# Altium PCB plp-cd_2c.PcbDoc
Units mm, origin at the board's own origin, x right, y up, seen from the top; angles counter-clockwise.
Board outline 34 x 22 mm, 4 copper layers (Top Layer, Signal Layer 1, Signal Layer 2, Bottom Layer), stack 1.026 mm thick; 45 components, 41 nets, 181 pads, 49 vias.
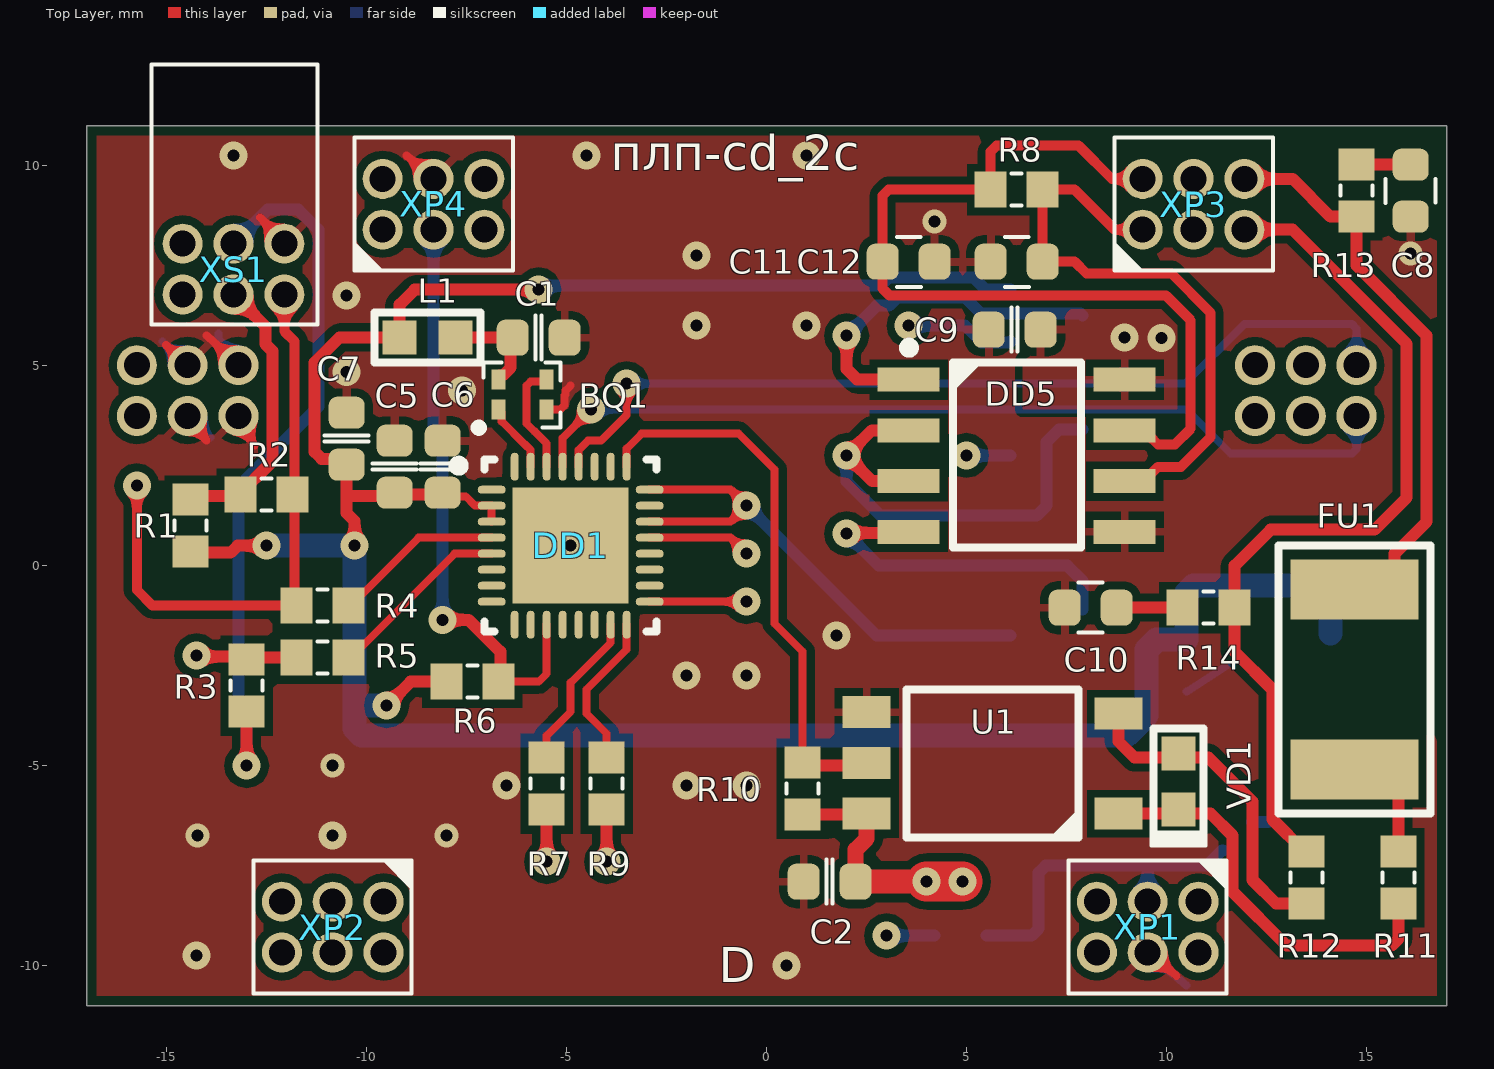
[diagram p0: Top Layer view]
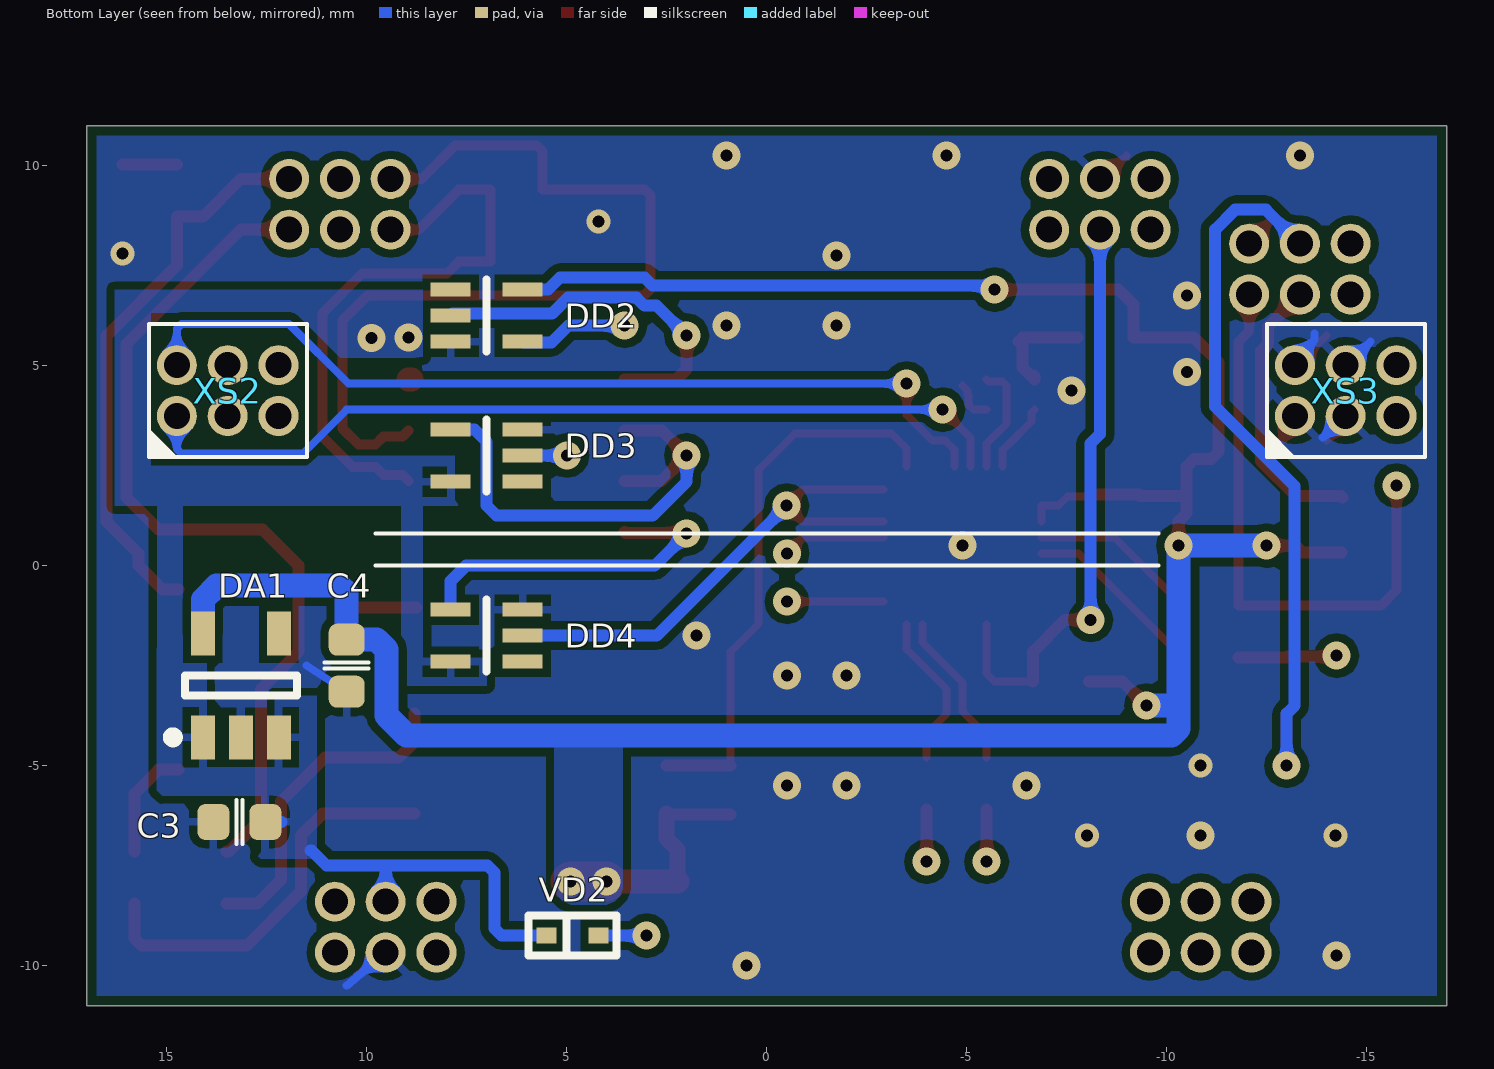
[diagram p1: Bottom Layer view, seen from below]
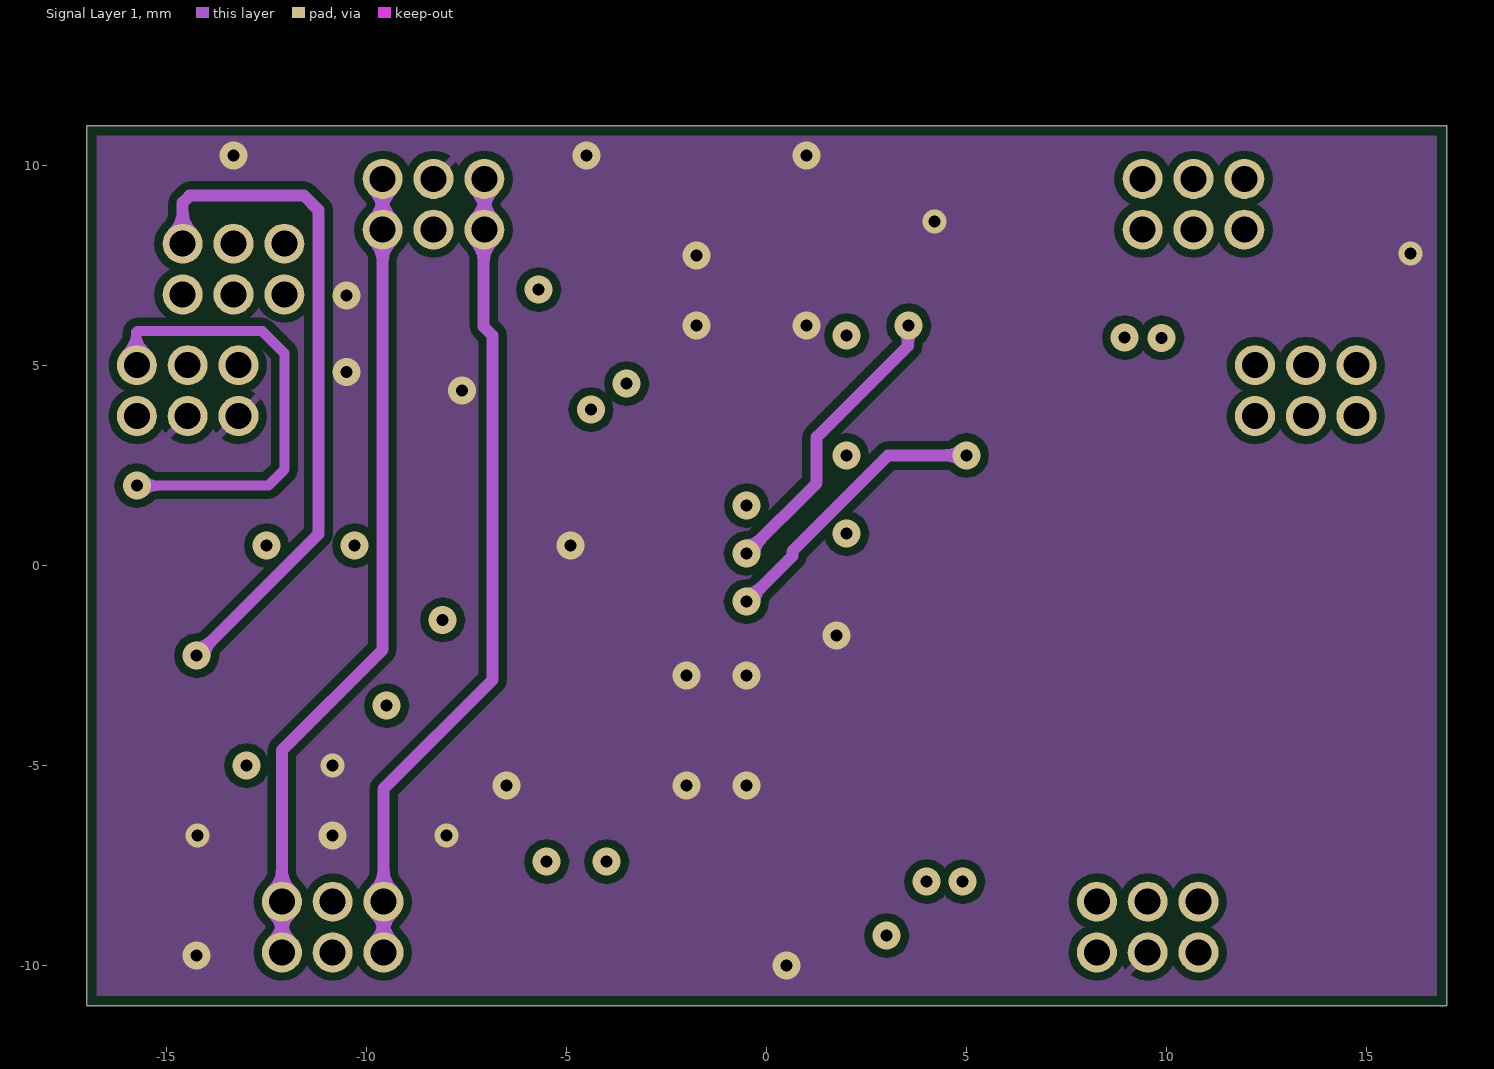
[diagram p2: Signal Layer 1]
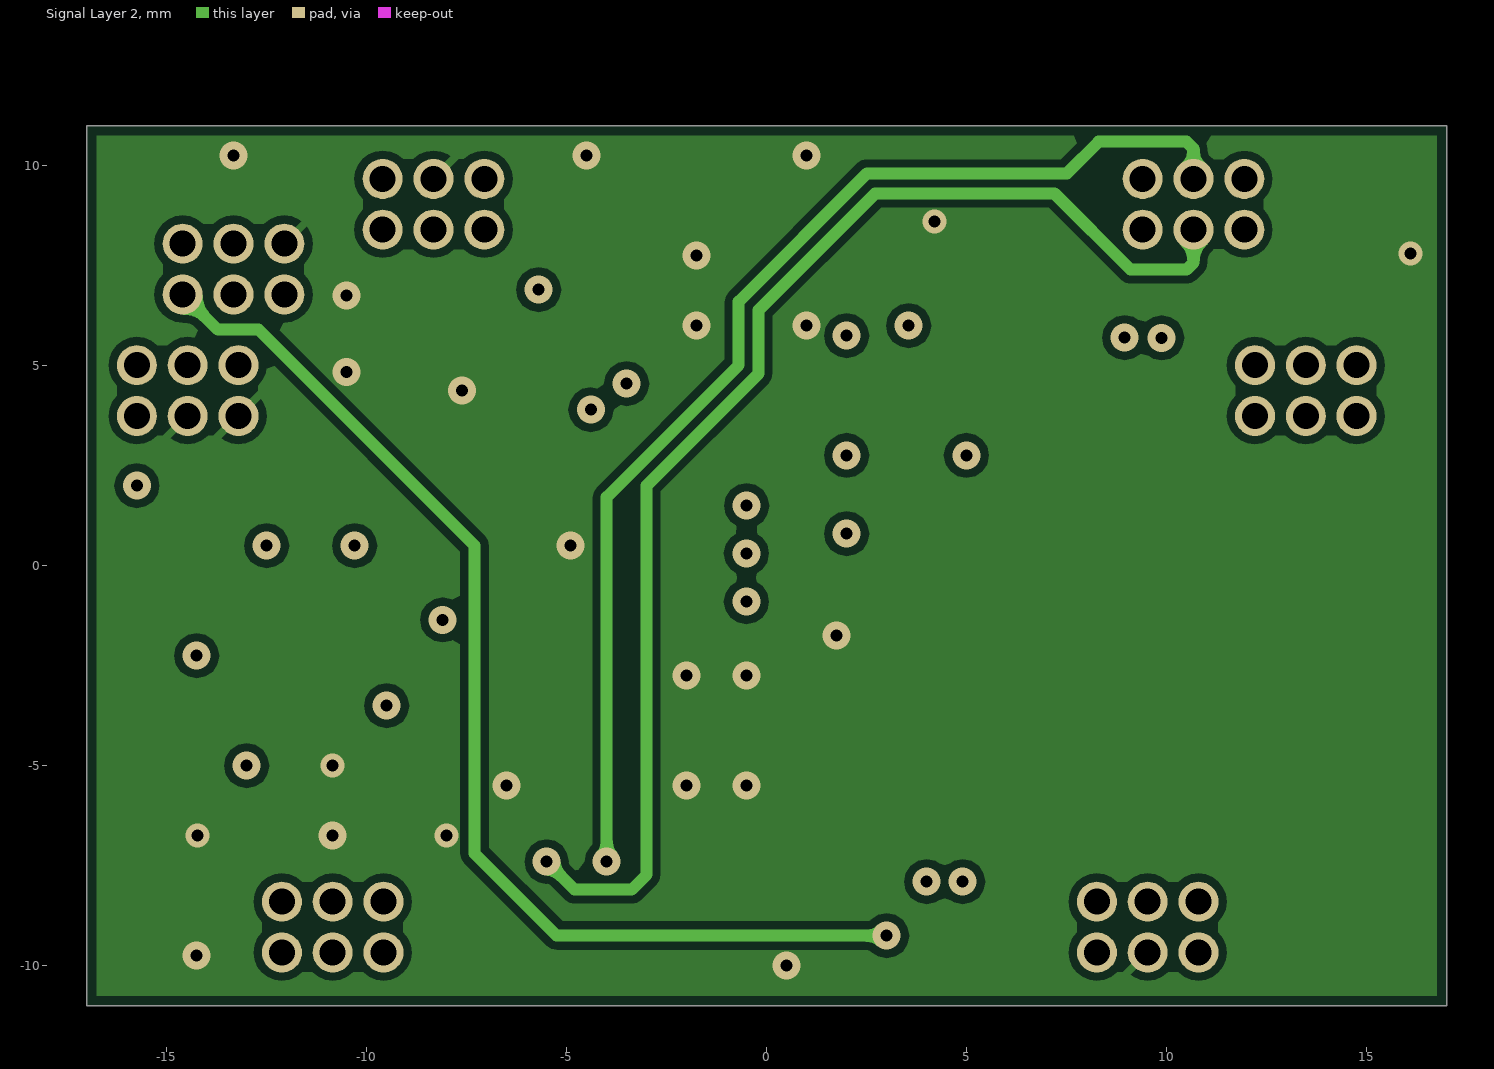
[diagram p3: Signal Layer 2]
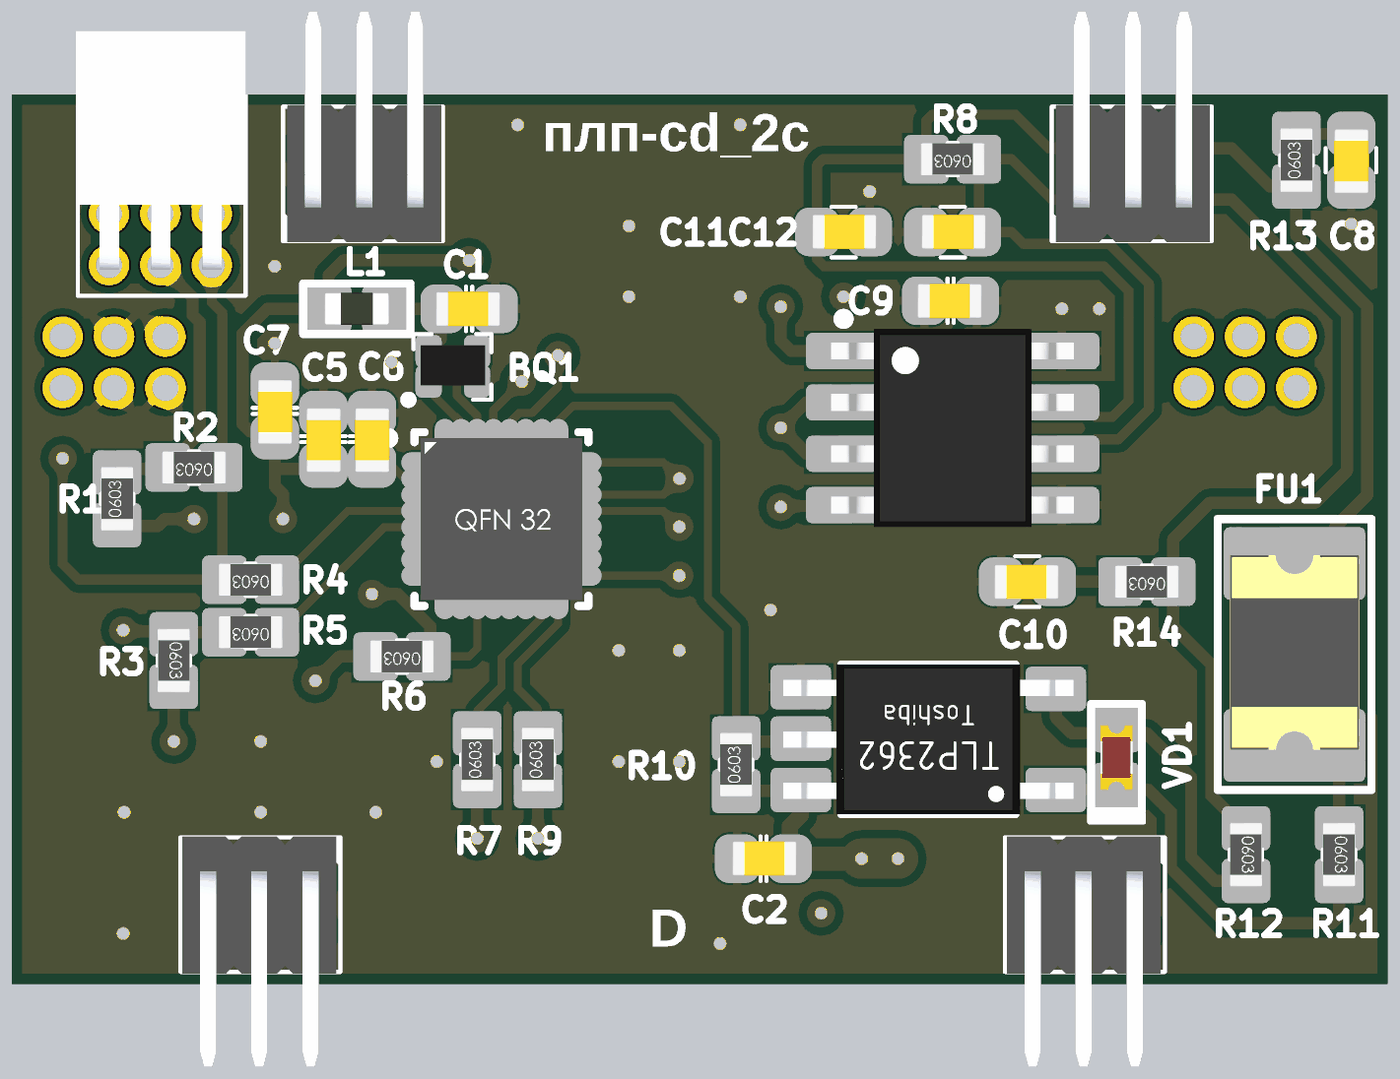
[diagram p4: 3D render of the assembled board from above, using the file's embedded part models]
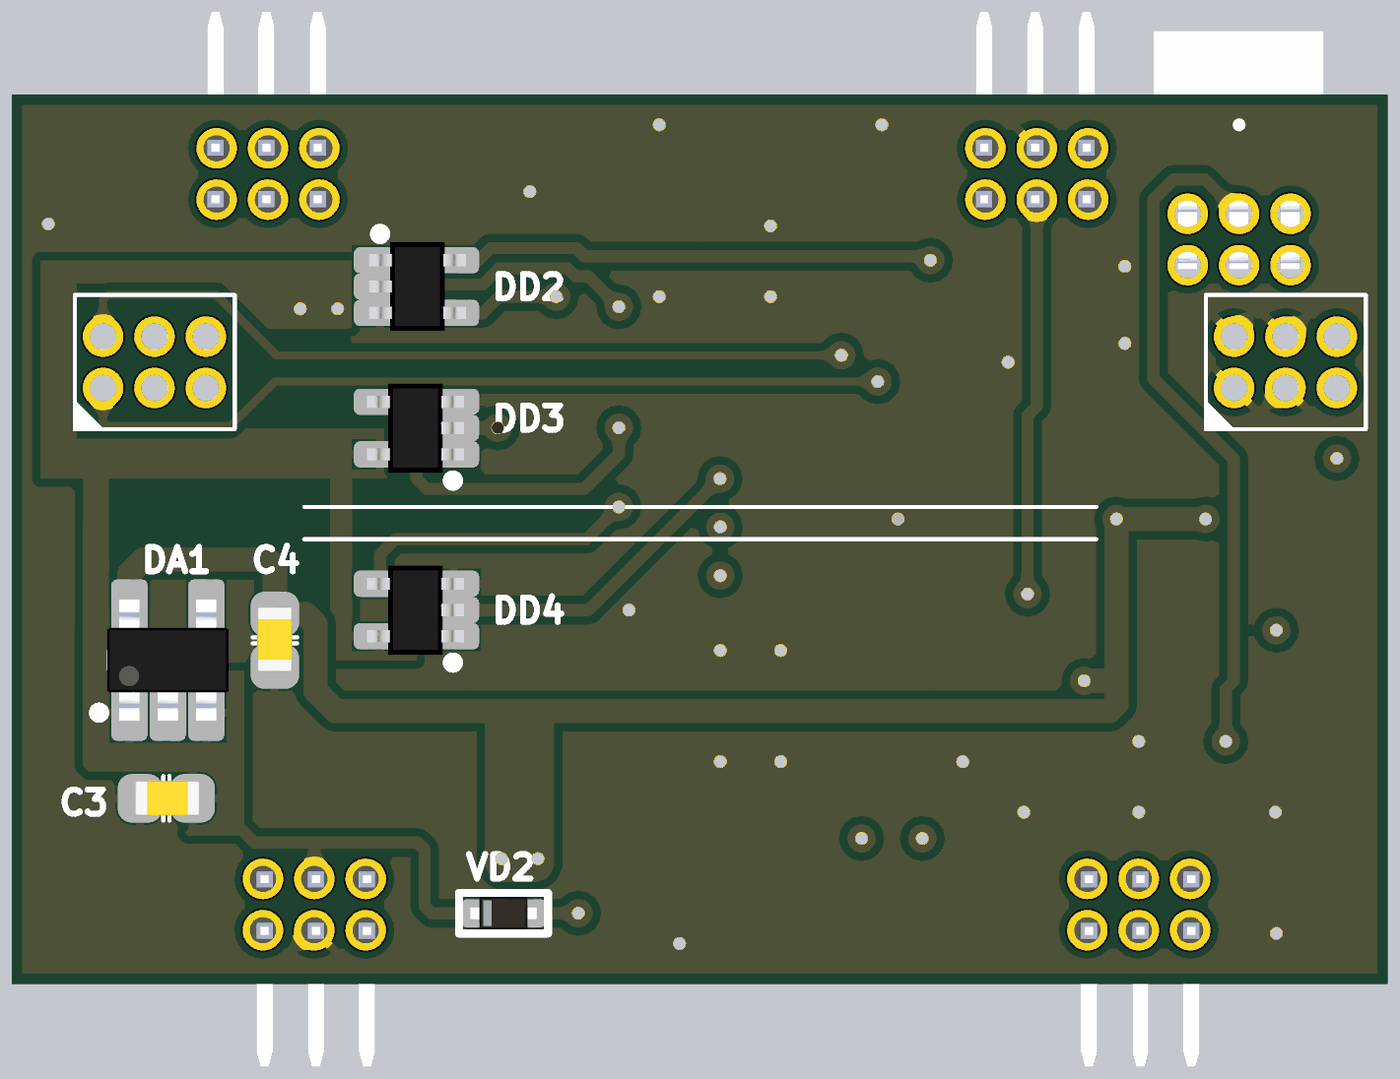
[diagram p5: 3D render of the assembled board from below, using the file's embedded part models]

## Layer stack, top to bottom
Top Solder: solder mask 0.0102, SM-001, Dk 3.5
Top Layer: signal copper 0.035
Dielectric 2: core 0.3, FR4, Dk 4.6
Signal Layer 1: signal copper 0.018
Dielectric 1: prepreg 0.32, FR4 HiTg170, Dk 4.7
Signal Layer 2: signal copper 0.018
Dielectric 3: core 0.3, FR4, Dk 4.6
Bottom Layer: signal copper 0.035
Bottom Solder: solder mask 0.0102, SM-001, Dk 3.5

## Board outline
-17,-9 -17,11 17,11 17,-11 -17,-11

## Design rules (kind name [scope] priority, off if disabled: settings)
AcuteAngle [All] p1: minimum=3.50000000000000E+0001 checktracksonly=FALSE
BoardOutlineClearance "BoardOutlineClearance 1" [All] p1: gap=0.25 ignorepadtopadclearanceinfootprint=FALSE // Milling
BoardOutlineClearance "BoardOutlineClearance 2" [All] p2 off: gap=0.4 ignorepadtopadclearanceinfootprint=FALSE except(0: Arc-SplitContinuation Track-SplitContinuation SMDPad-SplitContinuation THPad-SplitContinuation Via-SplitContinuation Fill-SplitContinuation Poly-SplitContinuation Region-SplitContinuation Text-SplitContinuation) // V-Cut
Clearance "Clearance-1 1 Oz" [All] p1: gap=0.2 ignorepadtopadclearanceinfootprint=TRUE except(0.25: Arc-Hole Track-Hole SMDPad-Hole THPad-Hole Via-Hole Fill-Hole Poly-Hole Region-Hole Text-Hole) // Standart
Clearance "Clearance-1 1/2 Oz" [All] p2 off: gap=0.125 ignorepadtopadclearanceinfootprint=FALSE except(0.2: Arc-Fill Arc-Poly Track-Fill Track-Poly SMDPad-SMDPad SMDPad-Fill SMDPad-Poly THPad-Fill THPad-Poly Via-Fill Via-Poly Fill-Fill Fill-Poly Poly-Poly Poly-Region Poly-Text; 0.25: Arc-Hole Track-Hole SMDPad-Hole THPad-Hole Via-Hole Fill-Hole Poly-Hole Region-Hole Text-Hole) // Standart
Clearance "Clearance-2 1/2 Oz" [All] p3 off: gap=0.1 ignorepadtopadclearanceinfootprint=FALSE except(0.15: Arc-Fill Arc-Poly Track-Fill Track-Poly SMDPad-SMDPad SMDPad-Fill SMDPad-Poly THPad-Fill THPad-Poly Via-Fill Via-Poly Fill-Fill Fill-Poly Poly-Poly Poly-Region Poly-Text; 0.25: Arc-Hole Track-Hole SMDPad-Hole THPad-Hole Via-Hole Fill-Hole Poly-Hole Region-Hole Text-Hole) // Advance
Clearance "Clearance 2 Oz" [All] p4 off: gap=0.3 ignorepadtopadclearanceinfootprint=FALSE except(0.25: Arc-Hole Track-Hole SMDPad-Hole THPad-Hole Via-Hole Fill-Hole Poly-Hole Region-Hole Text-Hole)
Clearance "Clearance-2 1 Oz" [All] p5 off: gap=0.15 ignorepadtopadclearanceinfootprint=FALSE except(0.2: Arc-Fill Arc-Poly Track-Fill Track-Poly SMDPad-Fill SMDPad-Poly THPad-Fill THPad-Poly Via-Fill Via-Poly Fill-Fill Fill-Poly Poly-Poly; 0.25: Arc-Hole Track-Hole SMDPad-Hole THPad-Hole Via-Hole Fill-Hole Poly-Hole Region-Hole Text-Hole) // Advance
Clearance "Clearance 3 Oz" [All] p6 off: gap=0.35 ignorepadtopadclearanceinfootprint=FALSE except(0.25: Arc-Hole Track-Hole SMDPad-Hole THPad-Hole Via-Hole Fill-Hole Poly-Hole Region-Hole Text-Hole)
DiffPairsRouting "DiffPairsRouting 1 Oz" [All] p1: maxlimit=0.254 minlimit=0.2 mostfreqgap=0.254 toplayer_minwidth=0.2 toplayer_maxwidth=0.381 toplayer_prefwidth=0.381 midlayer1_minwidth=0.2 midlayer1_maxwidth=0.381 midlayer1_prefwidth=0.381 midlayer2_minwidth=0.2 midlayer2_maxwidth=0.381 midlayer2_prefwidth=0.381 bottomlayer_minwidth=0.2 bottomlayer_maxwidth=0.381 bottomlayer_prefwidth=0.381 maxuncoupledlength=12.7
DiffPairsRouting "DiffPairsRouting 1/2 Oz" [All] p2 off: maxlimit=0.254 minlimit=0.1 mostfreqgap=0.254 toplayer_minwidth=0.1 toplayer_maxwidth=0.381 toplayer_prefwidth=0.381 midlayer1_minwidth=0.1 midlayer1_maxwidth=0.381 midlayer1_prefwidth=0.381 midlayer2_minwidth=0.1 midlayer2_maxwidth=0.381 midlayer2_prefwidth=0.381 bottomlayer_minwidth=0.1 bottomlayer_maxwidth=0.381 bottomlayer_prefwidth=0.381 maxuncoupledlength=12.7
HoleSize "Minimum HoleSize" [IsPad] p1: absolutevalues=TRUE maxlimit=5.9 minlimit=0.6 maxpercent=80.000 minpercent=20.000
HoleSize "Minimum HoleSize VIA 1" [IsVia] p2: absolutevalues=TRUE maxlimit=5.9 minlimit=0.3 maxpercent=80.000 minpercent=20.000 // Standart
HoleSize "Minimum HoleSize VIA 2" [IsVia] p3 off: absolutevalues=TRUE maxlimit=5.9 minlimit=0.2 maxpercent=80.000 minpercent=20.000 // Advance
HoleToHoleClearance Hole2HoleClearance [All] p1: gap=0.25 allowstackedmicrovias=FALSE
MinimumAnnularRing "Minimum AR VIA Standart" [IsVia] p1: minimumring=0.15
MinimumAnnularRing "Minimum AR PAD Standart" [IsPAD] p2: minimumring=0.2
MinimumAnnularRing "Minimum AR VIA Advance" [IsVia] p3: minimumring=0.1
MinimumAnnularRing "Minimum AR PAD Advance" [IsPAD] p4: minimumring=0.15
MinimumSolderMaskSliver "SolderMask Bridge Standart" [All] p1: minsoldermaskwidth=0.15 // All Masks
MinimumSolderMaskSliver "SolderMask Bridge Advance" [All] p2 off: minsoldermaskwidth=0.1 // Mask LDI
PasteMaskExpansion [All] p1: expansion=0.15
PlaneClearance "PlaneClearance 3 Oz" [All] p1 off: clearance=0.35
PlaneClearance "PlaneClearance 2 Oz" [All] p2 off: clearance=0.3
PlaneClearance "PlaneClearance 1 Oz" [All] p3: clearance=0.2
PlaneClearance "PlaneClearance-1 1/2 Oz" [All] p4 off: clearance=0.2 // Standart
PlaneClearance "PlaneClearance-2 1/2 Oz" [All] p5 off: clearance=0.15 // Advance
PlaneConnect "TermalConnect 3 Oz" [All] p1 off: planeconnectstyle=Relief reliefexpansion=0.2 reliefentries=4 reliefconductorwidth=0.35 reliefairgap=0.35 // Standart
PlaneConnect "TermalConnect 2 Oz" [All] p2 off: planeconnectstyle=Relief reliefexpansion=0.2 reliefentries=4 reliefconductorwidth=0.3 reliefairgap=0.3 // Standart
PlaneConnect "TermalConnect-1 1 Oz" [All] p3: planeconnectstyle=Relief reliefexpansion=0.2 reliefentries=2 reliefconductorwidth=0.2 reliefairgap=0.2 // Standart
PlaneConnect "TermalConnect-2 1 Oz" [All] p4 off: pad.planeconnectstyle=Relief pad.reliefexpansion=0.15 pad.reliefentries=4 pad.reliefconductorwidth=0.2 pad.reliefairgap=0.2 via.planeconnectstyle=Direct via.reliefexpansion=0.15 via.reliefentries=4 via.reliefconductorwidth=0.15 via.reliefairgap=0.15 // Advance
PlaneConnect "TermalConnect-1 1/2 Oz" [All] p5 off: planeconnectstyle=Relief reliefexpansion=0.2 reliefentries=4 reliefconductorwidth=0.2 reliefairgap=0.2 // Standart
PlaneConnect "TermalConnect-2 1/2 Oz" [All] p6 off: pad.planeconnectstyle=Relief pad.reliefexpansion=0.15 pad.reliefentries=4 pad.reliefconductorwidth=0.15 pad.reliefairgap=0.15 via.planeconnectstyle=Direct via.reliefexpansion=0.15 via.reliefentries=4 via.reliefconductorwidth=0.15 via.reliefairgap=0.15 // Advance
PolygonConnect "PolygonConnect 3 Oz" [All] p1 off: thpad.connectstyle=Relief thpad.reliefconductorwidth=0.35 thpad.reliefentries=4 thpad.polygonreliefangle="90 Angle" thpad.airgapwidth=0.35 smdpad.connectstyle=Relief smdpad.reliefconductorwidth=0.35 smdpad.reliefentries=4 smdpad.polygonreliefangle="90 Angle" smdpad.airgapwidth=0.35 via.connectstyle=Direct via.reliefconductorwidth=0.254 via.reliefentries=4 via.polygonreliefangle="90 Angle" via.airgapwidth=0.254
PolygonConnect "PolygonConnect 2 Oz" [All] p2 off: thpad.connectstyle=Relief thpad.reliefconductorwidth=0.3 thpad.reliefentries=4 thpad.polygonreliefangle="90 Angle" thpad.airgapwidth=0.3 smdpad.connectstyle=Relief smdpad.reliefconductorwidth=0.3 smdpad.reliefentries=4 smdpad.polygonreliefangle="90 Angle" smdpad.airgapwidth=0.3 via.connectstyle=Direct via.reliefconductorwidth=0.254 via.reliefentries=4 via.polygonreliefangle="90 Angle" via.airgapwidth=0.254
PolygonConnect "PolygonConnect-1 1 Oz" [All] p3: thpad.connectstyle=Relief thpad.reliefconductorwidth=0.2 thpad.reliefentries=2 thpad.polygonreliefangle="135 Angle" thpad.airgapwidth=0.2 smdpad.connectstyle=Relief smdpad.reliefconductorwidth=0.2 smdpad.reliefentries=4 smdpad.polygonreliefangle="90 Angle" smdpad.airgapwidth=0.2 via.connectstyle=Direct via.reliefconductorwidth=0.254 via.reliefentries=4 via.polygonreliefangle="90 Angle" via.airgapwidth=0.254 // Standart
PolygonConnect "PolygonConnect-2 1 Oz" [All] p4 off: thpad.connectstyle=Relief thpad.reliefconductorwidth=0.15 thpad.reliefentries=4 thpad.polygonreliefangle="90 Angle" thpad.airgapwidth=0.15 smdpad.connectstyle=Relief smdpad.reliefconductorwidth=0.15 smdpad.reliefentries=4 smdpad.polygonreliefangle="90 Angle" smdpad.airgapwidth=0.15 via.connectstyle=Direct via.reliefconductorwidth=0.254 via.reliefentries=4 via.polygonreliefangle="90 Angle" via.airgapwidth=0.254 // Advance
PolygonConnect "PolygonConnect-1 1/2 Oz" [All] p5 off: thpad.connectstyle=Relief thpad.reliefconductorwidth=0.15 thpad.reliefentries=4 thpad.polygonreliefangle="90 Angle" thpad.airgapwidth=0.2 smdpad.connectstyle=Relief smdpad.reliefconductorwidth=0.2 smdpad.reliefentries=4 smdpad.polygonreliefangle="90 Angle" smdpad.airgapwidth=0.2 via.connectstyle=Direct via.reliefconductorwidth=0.254 via.reliefentries=4 via.polygonreliefangle="90 Angle" via.airgapwidth=0.254 // Standart
PolygonConnect "PolygonConnect-2 1/2 Oz" [All] p6 off: thpad.connectstyle=Relief thpad.reliefconductorwidth=0.125 thpad.reliefentries=4 thpad.polygonreliefangle="90 Angle" thpad.airgapwidth=0.15 smdpad.connectstyle=Relief smdpad.reliefconductorwidth=0.125 smdpad.reliefentries=4 smdpad.polygonreliefangle="90 Angle" smdpad.airgapwidth=0.15 via.connectstyle=Direct via.reliefconductorwidth=0.254 via.reliefentries=4 via.polygonreliefangle="90 Angle" via.airgapwidth=0.254 // Advance
RoutingCorners [All] p1 off: cornerstyle=45-Degree minsetback=2.54 maxsetback=2.54
RoutingVias [All] p1: holewidth=0.3 width=0.7 viastyle="Through Hole" minholewidth=0.2 minwidth=0.4 maxholewidth=5.9 maxwidth=6.4
ShortCircuit [All] p1: allowed=TRUE
SilkToSilkClearance Silk2SilkClearance [All] p1: silktosilkclearance=0.15
SilkToSolderMaskClearance Silk2SolderMaskClearance [All] p1: minsilkscreentomaskgap=0.15 clearancetoexposedcopper=FALSE
SolderMaskExpansion SolderMaskExpansion-1 [All] p1: expansion=0.05 istentingtop=FALSE // Standart
SolderMaskExpansion "SolderMaskExpansion LDI" [All] p2: expansion=0.025 istentingtop=FALSE // Advance
UnRoutedNet [All] p1: checkbadconnections=TRUE
Width "Width 1 Oz" [All] p1: maxlimit=10 minlimit=0.15 preferedwidth=0.2 checkconnectedcopper=TRUE
Width "Width 3 Oz" [All] p2 off: maxlimit=10 minlimit=0.35 preferedwidth=0.4 checkconnectedcopper=TRUE
Width "Width 2 Oz" [All] p3 off: maxlimit=10 minlimit=0.3 preferedwidth=0.35 minimp=50.000000 maximp=50.000000 favimp=50.000000 checkconnectedcopper=TRUE
Width "Width 1/2 Oz" [All] p4 off: maxlimit=10 minlimit=0.1 preferedwidth=0.125 checkconnectedcopper=TRUE
18 further rules are at their usual default settings.

## Components (designator, comment, footprint, x,y, rotation, side; value= is the part's Value field where it differs from the comment)
BQ1 "AMPMGFB-48.0000T" AMPMGFB(1.6x1.2) -6.7,3.9 r0 top
C1 "Ceramic capacitor, 0.1μF, X7R, ±10%, 16V, 0603, -55...+125°C" "CAP: 0603" -5.7,5.7 r180 top value=0.1μF
C2 "Ceramic capacitor, 0.1μF, X7R, ±10%, 16V, 0603, -55...+125°C" "CAP: 0603" 1.574,-7.9 r0 top value=0.1μF
C3 "Ceramic capacitor, 1μF, X7R, ±10%, 16V, 0603, -55...+125°C" "CAP: 0603" 13.183,-6.407 r180 bottom value=1μF
C4 "Ceramic capacitor, 1μF, X7R, ±10%, 16V, 0603, -55...+125°C" "CAP: 0603" 10.5,-2.5 r90 bottom value=1μF
C5 "Ceramic capacitor, 4.7μF, X7R, ±10%, 16V, 0603, -55...+125°C" "CAP: 0603" -9.3,2.475 r270 top value=4.7μF
C6 "Ceramic capacitor, 0.1μF, X7R, ±10%, 16V, 0603, -55...+125°C" "CAP: 0603" -8.1,2.475 r270 top value=0.1μF
C7 "Ceramic capacitor, 4.7μF, X7R, ±10%, 16V, 0603, -55...+125°C" "CAP: 0603" -10.5,3.175 r270 top value=4.7μF
C8 "Ceramic capacitor, 1n, X7R, ±10%, 16V, 0603, -55...+125°C" "CAP: 0603" 16.1,9.375 r270 top value=1n
C9 "Ceramic capacitor, 0.1μF, X7R, ±10%, 16V, 0603, -55...+125°C" "CAP: 0603" 6.2,5.9 r180 top value=0.1μF
C10 "Ceramic capacitor, 1n, X7R, ±10%, 16V, 0603, -55...+125°C" "CAP: 0603" 8.1,-1.05 r180 top value=1n
C11 "Ceramic capacitor, 36p, X7R, ±10%, 16V, 0603, -55...+125°C" "CAP: 0603" 3.55,7.6 r0 top value=36p
C12 "Ceramic capacitor, 36p, X7R, ±10%, 16V, 0603, -55...+125°C" "CAP: 0603" 6.25,7.6 r0 top value=36p
DA1 "LP5907MFX-3.3" SOT23-5 13.146,-2.99 r90 bottom
DD1 "EFM8BB31F64G-A-QFN32" 32-QFN(4x4) -4.9,0.5 r0 top (schematic designator U1)
DD2 "SN74LV1T34DCK" SC70-5 7,6.25 r180 bottom
DD3 "SN74LV1T34DCK" SC70-5 7,2.75 r0 bottom
DD4 "SN74LV1T34DCK" SC70-5 7,-1.75 r0 bottom
DD5 "MAX3443" 8-SOIC 6.25,2.75 r0 top
FU1 "FU1" "FUSE: 1812" 14.7,-2.5 r90 top
L1 "BLM18AG102SN1D" "IND: 0603" -8.475,5.7 r0 top
R1 "Resistor film, 10K, ±5%, 0603, 0.1W, -55...+125°C" "RES: 0603" -14.4,1 r90 top value=10K
R2 "Resistor film, 1K, ±5%, 0603, 0.1W, -55...+125°C" "RES: 0603" -12.5,1.775 r180 top value=1K
R3 "Resistor film, 1K, ±5%, 0603, 0.1W, -55...+125°C" "RES: 0603" -13,-3 r270 top value=1K
R4 "Resistor film, 100, ±5%, 0603, 0.1W, -55...+125°C" "RES: 0603" -11.1,-1 r180 top value=100
R5 "Resistor film, 100, ±5%, 0603, 0.1W, -55...+125°C" "RES: 0603" -11.1,-2.3 r180 top value=100
R6 "Resistor film, 10K, ±5%, 0603, 0.1W, -55...+125°C" "RES: 0603" -7.359,-2.9 r180 top value=10K
R7 "Resistor film, 1K, ±5%, 0603, 0.1W, -55...+125°C" "RES: 0603" -5.5,-5.45 r90 top value=1K
R8 "Resistor film, 120, ±5%, 0603, 0.1W, -55...+125°C" "RES: 0603" 6.25,9.4 r180 top value=120
R9 "Resistor film, 1K, ±5%, 0603, 0.1W, -55...+125°C" "RES: 0603" -4,-5.45 r90 top value=1K
R10 "Resistor film, 2K, ±5%, 0603, 0.1W, -55...+125°C" "RES: 0603" 0.9,-5.575 r90 top value=2K
R11 "Resistor film, 91, ±5%, 0603, 0.1W, -55...+125°C" "RES: 0603" 15.8,-7.8 r270 top value=91
R12 "Resistor film, 91, ±5%, 0603, 0.1W, -55...+125°C" "RES: 0603" 13.5,-7.8 r270 top value=91
R13 "Resistor film, 100, ±5%, 0603, 0.1W, -55...+125°C" "RES: 0603" 14.746,9.375 r90 top value=100
R14 "Resistor film, 100, ±5%, 0603, 0.1W, -55...+125°C" "RES: 0603" 11.05,-1.05 r180 top value=100
U1 "IC digital isolator, 10Mbps, 3750Vrms, 2.7...5.5V, -40...+125°C, 6-SOIC" "OPTO: TLP2362" 8.8,-6.2 r90 top
VD1 "LED, Green, *, *, *, -55...+150°C" "LED: 0603R" 10.3,-5.4 r270 top
VD2 "Schottky diode, 80V, 500mA, 1V, 15pF, SOD-123, -55...+150°C" "DIODE: SOD523" 4.2,-9.25 r0 bottom
XP1 "2199R05-06G-301523" "CON: PLL-6(2x3R1.27male)" 10.795,-8.4 r180 top locked
XP2 "2199R05-06G-301523" "CON: PLL-6(2x3R1.27male)" -9.58,-8.4 r180 top locked
XP3 "PLLD-6R" "CON: PLL-6(2x3R1.27male)" 9.4,8.4 r0 top locked
XP4 "2199R05-06G-301523" "CON: PLL-6(2x3R1.27male)" -9.6,8.4 r0 top locked
XS1 "PBD 1.27-6R" "CON: PLLD-6R(1.27)" -14.6,6.775 r0 top locked
XS2 "2199R05-06G-301523" "CON: PLL-6(2x3R1.27female)" 15.5,2.7 r180 bottom locked
XS3 "2199R05-06G-301523" "CON: PLL-6(2x3R1.27female)" -12.452,2.7 r180 bottom locked

## Footprints (in the part's own frame and the unit in brackets; to place one, negate y for a bottom-side part, rotate by r counter-clockwise, add the part's x,y. Pads: shape width x height; smd on the part's side, far side on the other; paste and mask are expansions set on the pad)
8-SOIC [mm] "pitch 1.27 mm"
  rect 1.55x0.6 smd: 1(-2.7,1.905) 2(-2.7,0.635) 3(-2.7,-0.635) 4(-2.7,-1.905) 5(2.7,-1.905) 6(2.7,-0.635) 7(2.7,0.635) 8(2.7,1.905)
  round 0.7 on Mech15: 28(-2.395,1.8)
  silkscreen extent -2.82,-2.3 1.61,2.82, body extent -3,-2.45 3,2.45, height 1.75
32-QFN(4x4) [mm] "QFN, 32-Leads, Body 4,00x4,00mm, Pitch 0,40mm, Thermal Pad 2,90x2,90mm, IPC Medium Density"
  rect 2.9x2.9 smd: 0(0,0)
  oval 0.7x0.2 smd: 1(-1.975,1.4) 2(-1.975,1) 3(-1.975,0.6) 4(-1.975,0.2) 5(-1.975,-0.2) 6(-1.975,-0.6) 7(-1.975,-1) 8(-1.975,-1.4) 17(1.975,-1.4) 18(1.975,-1) 19(1.975,-0.6) 20(1.975,-0.2) 21(1.975,0.2) 22(1.975,0.6) 23(1.975,1) 24(1.975,1.4)
  oval 0.2x0.7 smd: 9(-1.4,-1.975) 10(-1,-1.975) 11(-0.6,-1.975) 12(-0.2,-1.975) 13(0.2,-1.975) 14(0.6,-1.975) 15(1,-1.975) 16(1.4,-1.975) 25(1.4,1.975) 26(1,1.975) 27(0.6,1.975) 28(0.2,1.975) 29(-0.2,1.975) 30(-0.6,1.975) 31(-1,1.975) 32(-1.4,1.975)
  silkscreen extent -2.92,-2.15 2.15,2.15, body extent -2,-2 2,2, height 0.57
AMPMGFB(1.6x1.2) [mm]
  rect 0.35x0.5 smd: 1(0,0) 2(1.2,0) 3(1.2,0.75) 4(0,0.75)
  silkscreen extent -0.57,-0.8 1.55,1.17, body extent -0.2,-0.1 1.4,0.9, height 0.5
"CAP: 0603" [mm]
  rrect50% 0.8x0.9 smd: 1(-0.65,0) 2(0.65,0)
  silkscreen extent -0.08,-0.55 0.08,0.55, body extent -0.78,-0.43 0.83,0.44, height 0.8
"CON: PLL-6(2x3R1.27female)" [mm]
  round 1 hole 0.65: 1(0.754,1.042) 2(0.754,2.312) 3(2.024,1.042) 4(2.024,2.312) 5(3.294,1.042) 6(3.294,2.312)
  silkscreen extent 0.05,0.02 4.01,3.34
"CON: PLL-6(2x3R1.27male)" [mm]
  round 1 hole 0.65: 1(0,0) 2(0,1.27) 3(1.27,0) 4(1.27,1.27) 5(2.54,0) 6(2.54,1.27)
  silkscreen extent -0.7,-1.02 3.25,2.3, body extent -0.6,-1.05 3.21,4.65, height 4.39
"CON: PLLD-6R(1.27)" [mm]
  round 1 hole 0.65: 1(0,0.005) 2(0,1.275) 3(1.27,0.005) 4(1.27,1.275) 5(2.54,0.005) 6(2.54,1.275)
  silkscreen extent -1.5,-0.75 3.37,5.75, body extent -0.83,-0.1 3.38,5.8, height 3
"DIODE: SOD523" [mm]
  rect 0.5x0.4 smd: 1(0,0) 2(1.3,0)
  silkscreen extent -0.45,-0.5 1.75,0.5, body extent -0.17,-0.4 1.48,0.4, height 0.65
"FUSE: 1812" [mm]
  rect 1.5x3.2 smd: 1(-2.6,0) 2(1.9,0)
  Top Layer pour cut-out: -1.75,2.25
  Top Layer pour cut-out: -1.75,-2 1.75,-2 1.75,2 -1.5,2 -1.75,2
  silkscreen extent -3.7,-1.9 3,1.9, body extent -2.71,-1.61 2.11,1.61, height 1.32
"IND: 0603" [mm]
  rect 0.85x0.85 smd: 1(-0.7,0) 2(0.7,0)
  silkscreen extent -1.33,-0.63 1.33,0.63, body extent -0.8,-0.4 0.8,0.4, height 0.8
"LED: 0603R" [mm]
  rect 0.85x0.85 smd: 1(-0.7,0) 2(0.7,0)
  silkscreen extent -1.33,-0.63 1.33,0.63, body extent -0.8,-0.4 0.8,0.4, height 0.6
"OPTO: TLP2362" [mm]
  rect 0.8x1.2 smd: 1(0,0) 3(2.5,0) 4(2.54,6.3) 5(1.27,6.3) 6(0,6.3)
  round 0.5 on Mech1: ""(-0.1,0.1)
  silkscreen extent -0.6,1 3.1,5.3, body extent -0.6,-0.44 3.1,6.74, height 2.22
"RES: 0603" [mm]
  rect 0.8x0.9 smd: 1(-0.65,0) 2(0.65,0)
  silkscreen extent -0.13,-0.4 0.13,0.4, body extent -0.8,-0.4 0.8,0.4, height 0.44
SC70-5 [mm] "pitch 0.95 mm"
  rect 1x0.35 smd: 1(-0.9,0.65) 2(-0.9,0) 3(-0.9,-0.65) 4(0.9,-0.65) 5(0.9,0.65)
  round 0.5 on Bottom Overlay: ""(-0.9,1.3)
  round 0.5 on Mech15: ""(-0.775,0.725)
  silkscreen extent 0,-0.9 0,0.9, body extent -1.18,-1.1 1.22,1.1, height 1.09
SOT23-5 [mm] "pitch 0.95 mm"
  rect 1.1x0.6 smd: 1(-1.3,0.95) 2(-1.3,0) 3(-1.3,-0.95) 4(1.3,-0.95) 5(1.3,0.95)
  round 0.5 on Mech13: ""(-1.1,1.1)
  silkscreen extent -1.42,-1.4 0.25,1.83, body extent -1.5,-1.5 1.5,1.5, height 1.3

## Part data
C1 C2 C3 C4 C5 C6 C7 C8 C9 C10 C11 C12: library part Ceramic_0603, Manufacturer=Yageo, Package=0603, PartNumber=CC0603KRX7R7BB104, Temperature=-55...+125°C, Tolerance=±10%, TypeCapacitor="Ceramic capacitor", TypeDielectric=X7R, Voltage=16V, HelpURL=https://www.digikey.com/product-detail/en/yageo/CC0603KRX7R7BB104/311-1088-1-ND/302998
  C1 C2 C6 C9: ValueManufacturerPartNumber="Ceramic capacitor, 0.1μF, X7R, ±10%, 16V, 0603, -55...+125°C"
  C3 C4: ValueManufacturerPartNumber="Ceramic capacitor, 1μF, X7R, ±10%, 16V, 0603, -55...+125°C"
  C5 C7: ValueManufacturerPartNumber="Ceramic capacitor, 4.7μF, X7R, ±10%, 16V, 0603, -55...+125°C"
  C8 C10: ValueManufacturerPartNumber="Ceramic capacitor, 1n, X7R, ±10%, 16V, 0603, -55...+125°C"
  C11 C12: ValueManufacturerPartNumber="Ceramic capacitor, 36p, X7R, ±10%, 16V, 0603, -55...+125°C"
DA1: "LDO 250 mA"
DD1: "8051 MCU Core"
DD2 DD3 DD4: "Single Buffer", ComponentLink1Description=Datasheet, ComponentLink1URL=https://www.ti.com/lit/ds/symlink/sn74lv1t34.pdf?ts=1607003293244&ref_url=https%253A%252F%252Fwww.ti.com%252Fproduct%252FSN74LV1T34
DD5: library part SN65HVD72DGK, "RS-485/422", ComponentLink1Description=Datasheet, ComponentLink1URL=https://www.ti.com/lit/ds/symlink/sn65hvd72.pdf?ts=1607084930164&ref_url=https%253A%252F%252Fwww.ti.com%252Fstore%252Fti%252Fen%252Fp%252Fproduct%252F%253Fp%253DSN65HVD72DRBT
FU1: library part MF-MSMF020/60-2
L1: "100MHz 1K"
R1 R2 R3 R4 R5 R6 R7 R8 R9 R10 R11 R12 R13 R14: library part Resistor_0603, Manufacturer=Yageo, Package=0603, PartNumber=RC0603JR-07100RL, Power=0.1W, Temperature=-55...+125°C, Tolerance=±5%, TypeResistor="Resistor film", HelpURL=https://www.digikey.com/product-detail/en/yageo/RC0603JR-07100RL/311-100GRCT-ND/729644
  R1 R6: ValueManufacturerPartNumber="Resistor film, 10K, ±5%, 0603, 0.1W, -55...+125°C"
  R2 R3 R7 R9: ValueManufacturerPartNumber="Resistor film, 1K, ±5%, 0603, 0.1W, -55...+125°C"
  R4 R5 R13 R14: ValueManufacturerPartNumber="Resistor film, 100, ±5%, 0603, 0.1W, -55...+125°C"
  R8: ValueManufacturerPartNumber="Resistor film, 120, ±5%, 0603, 0.1W, -55...+125°C"
  R10: ValueManufacturerPartNumber="Resistor film, 2K, ±5%, 0603, 0.1W, -55...+125°C"
  R11 R12: ValueManufacturerPartNumber="Resistor film, 91, ±5%, 0603, 0.1W, -55...+125°C"
U1: library part TLP, "Optoisolator", Manufacturer=Toshiba, Package=6-SOIC, PartNumber=TLP2366, Temperature=-40...+125°C, ComponentType="IC digital isolator", DataRate=10Mbps, HelpURL=https://www.digikey.com/product-detail/en/toshiba-semiconductor-and-storage/TLP2362-E/TLP2362E-ND/3056608, Isolation=3750Vrms, Supply=2.7...5.5V, ValueManufacturerPartNumber="IC digital isolator, 10Mbps, 3750Vrms, 2.7...5.5V, -40...+125°C, 6-SOIC"
VD1: library part LED_single, Color=GREEN, ColorParameter=Green, Temperature=-55...+150°C, TypeDiode=LED, ValueManufacturerPartNumber="LED, Green, *, *, *, -55...+150°C"
VD2: library part Schottky_single, Current=500mA, Manufacturer="Diodes Incorporated", Package=SOD-123, PartNumber=BAT54XV2, Temperature=-55...+150°C, Voltage=80V, VoltageDrop=1V, HelpURL=https://www.digikey.com/product-detail/en/diodes-incorporated/MBR0580S1-7/MBR0580S1-7DICT-ND/5080371, RecoveryTime=15pF, TypeDiode="Schottky diode", ValueManufacturerPartNumber="Schottky diode, 80V, 500mA, 1V, 15pF, SOD-123, -55...+150°C"
XP1 XP2 XP4: library part 2199R05-06G-301523Out, "Step 1.27 R"
XP3: library part PLLD-6R(Male), "Step 1.27 R"
XS2 XS3: library part 2199R05-06G-301523In, "Step 1.27"

## Via types
v1: diameter 0.7, hole 0.3, Top Layer to Bottom Layer, tented both sides, 43 vias
v2: diameter 0.6, hole 0.3, Top Layer to Bottom Layer, tented both sides, 5 vias
v3: diameter 0.7, hole 0.3, Top Layer to Bottom Layer, tented bottom, 1 vias

## Nets (pads, with @x,y where several pads share a name; then routed paths per layer and width w, separated by ;. In a path a pad name is that pad's centre, name@x,y a point inside that pad or via, vN(x,y) a via of type N, cw(c..) or ccw(c..) an arc to the next point about the centre after c; other vN are vias at no path point)
3.3V: C2.2 C4.2 C5.2 C6.2 C7.2 DA1.5 DD1.2 DD1.3 DD2.5 L1.1 R1.1 R6.2 R10.1 U1.6 | length 74.2
  Top Layer w0.2: C6.2@-8.1,1.775 -8.059,1.734 -7.525,1.734 -7.291,1.5 DD1.2 DD1.3
  Top Layer w0.3: R1.1@-14.375,0.325 -13.4,0.325 -13.225,0.5 v1(-12.5,0.5) ; v1(-10.3,0.5) -10.3,1.113 -10.5,1.313 -10.5,1.737 ; v1(-9.5,-3.5) -8.9,-2.9 R6.2@-8.059,-2.9 ; C6.2@-8.1,1.775 -9.3,1.775 -9.337,1.737 -10.5,1.737 ; v1(-5.7,6.9) -8.8,6.9 -9.175,6.525 L1.1 -10.683,5.7 -11.3,5.083 -11.3,2.846 -11.124,2.67 -10.695,2.67 -10.5,2.475 -10.5,1.737 ; R10.1 U1.6@2.475,-6.225
  Top Layer w0.4: C2.2 2.224,-7.1 2.5,-6.824 U1.6
  Top Layer w0.6: C2.2 v1(4,-7.9)
  Top Layer w1: v1(4,-7.9) v1(4.9,-7.9)
  Bottom Layer w0.3: v1(-5.7,6.9) -5.6,7 2.853,7 3.053,7.2 5.174,7.2 5.474,6.9 DD2.5
  Bottom Layer w0.6: v1(-12.5,0.5) v1(-10.3,0.5) -10.3,-3.5 ; v1(-9.5,-3.5) -10.3,-3.5 ; DA1.5 14.096,-0.846 13.75,-0.5 10.676,-0.5 10.5,-0.676 C4.2 9.75,-1.85 9.5,-2.1 9.5,-3.75 9,-4.25 -10.124,-4.25 -10.3,-4.074 -10.3,-3.5
5V: C3.2 C9.1 DA1.1 DA1.3 DD3.5 DD4.5 DD5.8 VD2.2 XP1.3 | length 9
  Top Layer w0.6: DD5.8@8.886,4.655 DD5.8
  Bottom Layer w0.3: VD2.2 6.624,-9.25 6.8,-9.074 6.8,-7.676 6.976,-7.5 9.525,-7.5 ; XP1.3 9.525,-7.5 ; 11.41,-7.122 11.378,-7.122 11,-7.5 9.525,-7.5 ; 12.126,-6.407 C3.2
  other v1: 8.95,5.7 9.875,5.698
+15: XP1.2
+Uп: XP2.5 XP2.6 XP4.1 XP4.2 | length 20.4
  Signal Layer 1 w0.3: XP2.6 XP2.5 -12.12,-4.62 -9.6,-2.1 XP4.1 XP4.2
-15: XP1.6
-Uп: XP2.1 XP2.2 XP4.5 XP4.6 | length 20.6
  Signal Layer 1 w0.3: XP2.2 XP2.1 -9.58,-5.58 -6.853,-2.853 -6.853,5.753 -7.075,5.975 -7.075,8.385 XP4.5 XP4.6
C2CK: R2.1 R4.2 XS1.5 XS3.6 | length 26.1
  Top Layer w0.25: v1(-15.746,2) -15.746,-0.608 -15.354,-1 -11.8,-1 -11.8,1.775 -11.8,5.602 -12.06,5.862 XS1.5
  Signal Layer 1 w0.25: v1(-15.746,2) -12.46,2 -12.06,2.4 -12.06,5.313 -12.609,5.862 -15.74,5.862 -15.765,5.837 -15.765,5.031 XS3.6
C2D: R3.1 R5.2 XS1.2 | length 19.5
  Top Layer w0.3: v1(-14.25,-2.25) -14.225,-2.275 -13.025,-2.275 -13,-2.3 R5.2@-11.8,-2.3
  Signal Layer 1 w0.3: XS1.2 -14.6,9.074 -14.424,9.25 -11.566,9.25 -11.21,8.894 -11.21,0.79 v1(-14.25,-2.25)
C2Dsns: R3.2 XS1.4 | length 18.3
  Top Layer w0.3: v1(-13,-5) R3.2@-13,-3.7
  Bottom Layer w0.3: XS1.4 -12.48,8.9 -11.708,8.9 -11.21,8.402 -11.21,3.977 -13.2,1.987 -13.2,-3.5 -13,-3.7 v1(-13,-5)
EXTCLK: BQ1.3 DD1.30 | length 2.8
  Top Layer w0.2: DD1.30 -5.5,3.056 -5.794,3.35 -5.799,3.35 -6,3.551 -6,4.5 -5.9,4.6 -5.55,4.6 BQ1.3
EXTOn: BQ1.1 DD1.31 | length 1.7
  Top Layer w0.2: BQ1.1 -6.625,3.825 -6.625,3.61 -6.06,3.045 ; -6.039,3.03 -5.9,2.891 DD1.31
GND: BQ1.2 C1.1 C2.1 C3.1 C4.1 C5.1 C6.1 C7.1 C8.2 C9.2 C10.2 C11.2 C12.1 DA1.2 DD1.0 DD2.3 DD3.3 DD4.3 DD5.5 U1.4 XP1.4 XP4.4 XS1.6 XS3.1 XS3.2 XS3.3 XS3.4 | length 13.1
  Top Layer w0.2: -15.015,5.515 XS3.4 ; XS3.3@-14.467,3.742 XS3.3 -14,3.125 ; -14,5.75 XS3.2 ; XS3.1@-13.206,3.575 XS3.1 -12.806,3 ; -12.668,8.712 XS1.6 XS1.6@-12.05,8.05 ; -9,10.25 XP4.4 XP4.4@-8.33,9.755 ; BQ1.2 -5.167,3.9 -5.05,4.017 -5.05,4.251 -5.025,4.276 -5.025,4.375 -4.9,4.5 ; XP1.4@9.525,-9.75 XP1.4 10.247,-10.253
  Signal Layer 1 w0.2: XP1.4 XP1.4@9.57,-9.67
  Signal Layer 2 w0.2: XS3.3 XS3.3@-14.442,3.742 ; XP4.4 XP4.4@-8.33,9.73 ; XP1.4 XP1.4@9.57,-9.67
  Bottom Layer w0.2: -15.1,5.6 -14.512,5.012 XS3.4 ; XS3.3 -14.442,3.742 -13.9,3.2 ; -13.7,5.8 -13.7,5.649 -13.206,5.155 XS3.2 ; XP4.4 XP4.4@-8.33,9.73 ; XP1.4@9.525,-9.825 XP1.4 10.5,-10.5 ; C4.1 11.5,-2.5
  other v1: 0.5,-10 -14.25,-9.75 -10.85,-6.75 -6.5,-5.5 -2,-5.5 -0.507,-5.5 -2,-2.75 -0.507,-2.75 1.75,-1.75 -7.621,4.379 -10.505,4.845 -1.75,6 1,6 -10.505,6.75 -1.75,7.75 -13.33,10.25 -4.5,10.25 1,10.25
  other v2: -14.225,-6.75 -8.009,-6.75 -10.85,-5 16.1,7.8 4.2,8.6
  other v3: -4.9,0.5
GREEN_LED: R9.1 XP3.4 | length 30.5
  Top Layer w0.3: v1(-4,-7.4) R9.1
  Signal Layer 2 w0.3: v1(-4,-7.4) -4,1.714 -0.7,5.014 -0.7,6.6 2.504,9.804 7.504,9.804 8.3,10.6 10.494,10.6 10.67,10.424 XP3.4
MOSI_MCU2: DD1.23
NetBQ1_4: BQ1.4 C1.2 L1.2 | length 2.7
  Top Layer w0.3: L1.2 C1.2@-6.4,5.7 ; BQ1.4 -6.7,4.725 -6.675,4.75 -6.6,4.75 -6.4,4.95 C1.2@-6.4,5.7 ; C1.2@-6.3,5.6 C1.2@-6.4,5.7
NetC8_1: C8.1 R13.2 | length 1.4
  Top Layer w0.3: R13.2 C8.1
NetC10_1: C10.1 R14.2 | length 1.6
  Top Layer w0.3: C10.1 R14.2
NetDD1_4: DD1.4 R4.1 | length 4.2
  Top Layer w0.2: R4.1@-10.4,-1 -8.7,0.7 DD1.4
NetDD1_5: DD1.5 R5.1 | length 4.6
  Top Layer w0.2: R5.1@-10.4,-2.3 -7.8,0.3 DD1.5
NetDD1_15: DD1.15 R7.2 | length 4
  Top Layer w0.2: R7.2 -5.5,-4.25 -4.9,-3.65 -4.9,-2.925 -3.9,-1.925 DD1.15
NetDD1_16: DD1.16 R9.2 | length 3.9
  Top Layer w0.2: R9.2 -4,-4.2 -4.5,-3.7 -4.5,-3.091 -3.5,-2.091 DD1.16
NetDD2_2: DD2.2 DD5.1 | length 9
  Top Layer w0.3: v1(2,5.75) 2,4.918 2.263,4.655 DD5.1
  Bottom Layer w0.3: v1(2,5.75) 2.75,6.5 3.06,6.5 3.26,6.7 4.967,6.7 5.367,6.3 7.85,6.3 DD2.2
NetDD3_4: DD3.4 DD5.2 DD5.3 | length 12.4
  Top Layer w0.3: DD5.3 2.642,2.115 v1(2,2.757) 2.628,3.385 DD5.2
  Bottom Layer w0.3: v1(2,2.757) 2,2.1 2.85,1.25 6.75,1.25 7,1.5 7,3.097 7.303,3.4 DD3.4
NetDD4_4: DD4.4 DD5.4 | length 8.7
  Top Layer w0.3: v1(2,0.8) 2.023,0.822 3.527,0.822 DD5.4
  Bottom Layer w0.3: v1(2,0.8) 2.8,0 7.517,0 7.9,-0.383 DD4.4
NetFU1_1: FU1.1 R11.1 | length 2.8
  Top Layer w0.3: FU1.1 15.2,-5.1 15.8,-5.7 R11.1
NetR11_2: R11.2 U1.1 VD1.2 | length 10.1
  Top Layer w0.3: U1.1 10.3,-6.2 11.1,-6.2 11.645,-6.745 11.645,-8.145 13,-9.5 15.624,-9.5 15.8,-9.324 R11.2
NetR12_2: R12.2 U1.3 VD1.1 | length 8.2
  Top Layer w0.3: U1.3 8.8,-4.4 9.2,-4.8 10.4,-4.8 11.046,-4.8 12.145,-5.899 12.145,-7.857 12.738,-8.45 R12.2
NetVD2_1: VD2.1 XS1.1 | length 30
  Top Layer w0.3: v1(3,-9.25) v1@3.037,-9.212
  Signal Layer 2 w0.3: XS1.1 -13.72,5.9 -12.7,5.9 -7.3,0.5 -7.3,-7.2 -5.25,-9.25 v1(3,-9.25)
  Bottom Layer w0.3: v1(3,-9.25) VD2.1
P2.6: DD1.11 R6.1 XP4.3 | length 14.8
  Top Layer w0.2: R6.1@-6.659,-2.9 -5.7,-2.9 -5.5,-2.7 DD1.11
  Top Layer w0.3: v1(-8.1,-1.355) -7.454,-1.355 -6.659,-2.15 R6.1@-6.659,-2.9
  Bottom Layer w0.3: XP4.3 -8.33,3.289 -8.1,3.059 v1(-8.1,-1.355)
RE/DE: DD1.17 DD3.2 | length 10.6
  Top Layer w0.2: DD1.17 v1(-0.507,-0.9)
  Signal Layer 1 w0.3: v1(-0.507,-0.9) -0.5,-0.9 0.64,0.24 0.64,0.36 3.038,2.757 v1(4.993,2.757)
  Bottom Layer w0.2: v1(4.993,2.757) v1@4.996,2.754 ; DD3.2@6.096,2.754 DD3.2
  Bottom Layer w0.3: v1@4.996,2.754 DD3.2@6.096,2.754
RED_LED: R7.1 XP3.3 | length 33.3
  Top Layer w0.3: v1(-5.5,-7.4) R7.1
  Signal Layer 2 w0.3: v1(-5.5,-7.4) -4.8,-8.1 -3.376,-8.1 -3,-7.724 -3,2.007 -0.2,4.807 -0.2,6.393 2.711,9.304 7.196,9.304 9.1,7.4 10.494,7.4 10.67,7.576 XP3.3
RST: R1.2 R2.2 XS1.3 | length 7
  Top Layer w0.3: R1.2@-14.4,1.7 -14.363,1.737 -13.238,1.737 -12.356,2.619 -12.356,5.364 -12.535,5.544 -12.535,5.985 XS1.3
SCKA: R12.1 R14.1 XP3.5 | length 22
  Top Layer w0.3: XP3.5 13.146,8.4 16,5.546 16,1.7 15.2,0.9 12.6,0.9 11.7,0 R14.1 11.7,-2.15 12.645,-3.095 12.645,-6.345 13.45,-7.15 R12.1
SCKB: FU1.2 R13.1 XP3.6 | length 14.2
  Top Layer w0.3: XP3.6 13.146,9.67 14.091,8.725 R13.1 14.746,7.507 16.5,5.753 16.5,1.1 15.7,0.3 15.7,0 15.1,-0.6 FU1.2
"SSI OUT A": C12.2 DD5.6 R8.1 XP3.1 | length 15.2
  Top Layer w0.25: DD5.6 9.1,2.265 9.575,2.265 9.783,2.473 10.354,2.473 11.1,3.219 11.1,6.32 10.116,7.304 7.996,7.304 7.7,7.6 C12.2 R8.1 7.7,9.4 8.7,8.4 XP3.1
"SSI OUT B": C11.1 DD5.7 R8.2 XP3.2 | length 22.9
  Top Layer w0.25: DD5.7 9.1,3.235 9.575,3.235 9.783,3.027 10.201,3.027 10.6,3.426 10.6,6.136 9.986,6.75 3.076,6.75 2.9,6.926 C11.1 2.9,9.254 3.046,9.4 R8.2 5.6,10.354 5.746,10.5 7.8,10.5 8.63,9.67 XP3.2
SSI_MISO: DD1.22 DD1.24 DD4.2 | length 13.1
  Top Layer w0.2: DD1.22 -0.9,1.1 v1(-0.5,1.5) -0.9,1.9 DD1.24
  Bottom Layer w0.3: v1(-0.5,1.5) 2.75,-1.75 DD4.2
SSI_SCK: DD1.25 R10.2 U1.5 | length 14
  Top Layer w0.2: DD1.25 -3.5,2.925 -3.125,3.3 -0.7,3.3 0.2,2.4 0.2,-1.45 0.9,-2.15 R10.2 ; R10.2@0.9,-5 R10.2 ; R10.2@0.924,-4.901 R10.2
  Top Layer w0.3: R10.2@0.9,-5 U1.5@2.5,-5
UART1_RX: DD1.21 DD2.4 | length 12.7
  Top Layer w0.2: DD1.21 -0.9,0.7 v1(-0.507,0.307)
  Signal Layer 1 w0.3: v1(-0.507,0.307) 1.25,2.064 1.25,3.212 3.528,5.49 3.528,5.978 v1(3.55,6)
  Bottom Layer w0.3: v1(3.55,6) 4.96,6 5.374,5.586 6.086,5.586 DD2.4
UART_IN: DD1.28 XS2.2 | length 22.6
  Top Layer w0.2: DD1.28 -4.7,2.891 -4.466,3.125 -4.146,3.125 -3.5,3.771 v1(-3.5,4.55)
  Bottom Layer w0.2: v1(-3.5,4.55) 10.45,4.55 11.943,6.043 14.629,6.043 14.746,5.926 XS2.2
UART_OUT: DD1.29 XS2.1 | length 22.2
  Top Layer w0.2: DD1.29 -5.1,3.196 v1(-4.396,3.9)
  Bottom Layer w0.2: v1(-4.396,3.9) 10.5,3.9 11.6,2.8 14.629,2.8 14.746,2.917 XS2.1
pads on no net: DA1. DA1.4 DD1.1 DD1.6 DD1.7 DD1.8 DD1.9 DD1.10 DD1.12 DD1.13 DD1.14 DD1.18 DD1.19 DD1.20 DD1.26 DD1.27 DD1.32 DD2. DD2.1 DD3. DD3.1 DD4. DD4.1 DD5.28 U1. XP1.1 XP1.5 XP2.3 XP2.4 XS2.3 XS2.4 XS2.5 XS2.6 XS3.5
copper on no net: | length 0.2
  Bottom Layer w0.3: 9.4,9.67 9.534,9.804

## Polygon pours and split planes (outlines as drawn)
GND on Signal Layer 1 "GND_L02_P025" (solid, remove dead copper, pour order 25): -17,11 17,11 17,-11 -17,-11
no net on Signal Layer 1 "NONET_L02_P-001" (solid, pour order 9): -17,11
no net on Signal Layer 1 "NONET_L02_P-001" (solid, pour order 3): -13,1
GND on Bottom Layer "GND_L04_P024" (solid, remove dead copper, pour order 24): -17,11 -17,-11 17,-11 17,11
3.3V on Bottom Layer "3.3V_L04_P022" (solid, remove dead copper, pour order 22): 5.299,-7.975 cw(c4.799,-7.975) 4.799,-8.475 4.099,-8.475 cw(c4.099,-7.975) 3.6,-7.975 3.6,-4.225 5.31,-4.225 5.31,-7.975
no net on Bottom Layer "NONET_L04_P021" (solid, remove dead copper, pour order 21): 6,-8
5V on Bottom Layer "Bottom Layer-5V" (solid, remove dead copper, pour order 20): 11.25,-7.33 12.838,-7.33 12.839,-7.2 12.933,-7.2 12.932,-5.75 15.25,-5.75 15.241,1.5 16.3,1.5 16.3,6.9 8.5,6.9 8.5,5.2 10.7,5.2 11.83,6.33 15.4,6.33 15.4,2.494 14.6,2.494 14.6,2.75 7.795,2.75 7.795,2.125 7.525,2.125 7.526,1.5 7.799,1.5 8.594,1.5 8.594,-2.3 7,-2.3 7,-3 9.14,-3 9.14,1.5 14.037,1.5 14.6,1.5 14.597,-0.94 14.016,-0.94 13.994,-3.34 13.861,-3.34 13.858,-3.75 12.298,-3.75 12.298,-3.25 11.25,-3.25
no net on Bottom Layer "NONET_L04_P015" (solid, remove dead copper, pour order 15): 10.25,-7.25
no net on Bottom Layer "NONET_L04_P014" (solid, remove dead copper, pour order 14): 13.75,-7.75
GND on Top Layer "GND_L01_P023" (solid, remove dead copper, pour order 23): -17,11 17,11 17,-11 -17,-11
5V on Top Layer "5V_L01_P018" (solid, remove dead copper, pour order 18): 7.546,6.409 6.4,6.4 6.4,3.916 10.262,3.916 10.262,6.409
no net on Top Layer "NONET_L01_P017" (solid, remove dead copper, pour order 17): 7,6.3
GND on Signal Layer 2 "GND_L03_P026" (solid, remove dead copper, pour order 26): -17,11 -17,-11 17,-11 17,11

## Silkscreen, mask and mechanical layers (free items; w line width, h text height)
Top Overlay:
  lines w0.1: 9.625,-6.65 9.625,-7 10.975,-7 10.975,-6.725
  lines w0.3: 9.725,-6.9 10.875,-6.9
  text "плп-cd_2c" at -3.9,9.6 h1.5
  text "D" at -1.2,-10.7 h1.5
Bottom Overlay:
  lines w0.1: -9.8,0 9.775,0 ; -9.8,0.8 9.775,0.8
TP:
  circle w0.2: c-6.7,3.8 r0.1
  circle w0.5: c5.19,4.492 r0.224
  circle w0.5: c7.197,-6.2 r0.224
  circle w0.5: c-6.5,2.1 r0.224
  region: 10.447,-6.3 9.847,-5.1 11.047,-5.1
  lines w0.15: -15.4,6 -11.2,6 -11.2,11 -15.4,11 -15.4,6 ; -14.8,0 -14.8,2 -14,2 -14,0 -14.8,0 ; -13.5,1.4 -11.5,1.4 -11.5,2.2 -13.5,2.2 -13.5,1.4 ; -13.4,-4 -13.4,-2 -12.6,-2 -12.6,-4 -13.4,-4 ; -12.8,-10.7 -8.9,-10.7 -8.9,-7.4 -12.8,-7.4 -12.8,-10.7 ; -12.1,-2.7 -12.1,-1.9 -10.1,-1.9 -10.1,-2.7 -12.1,-2.7 ; -12.1,-1.4 -12.1,-0.6 -10.1,-0.6 -10.1,-1.4 -12.1,-1.4 ; -10.9,2.2 -10.9,4.2 -10.1,4.2 -10.1,2.2 -10.9,2.2 ; -10.3,7.4 -10.3,10.7 -6.4,10.7 -6.4,7.4 -10.3,7.4 ; -9.7,1.5 -9.7,3.5 -8.9,3.5 -8.9,1.5 -9.7,1.5 ; -9.5,5.3 -7.5,5.3 -7.5,6.1 -9.5,6.1 -9.5,5.3 ; -8.5,1.5 -8.5,3.5 -7.7,3.5 -7.7,1.5 -8.5,1.5 ; -8.4,-3.3 -6.4,-3.3 -6.4,-2.5 -8.4,-2.5 -8.4,-3.3 ; -7.1,-1.7 -7.1,2.7 -2.7,2.7 -2.7,-1.7 -7.1,-1.7 ; -7.1,3.5 -5.2,3.5 -5.2,5.1 -7.1,5.1 -7.1,3.5 ; -6.7,5.3 -6.7,6.1 -4.7,6.1 -4.7,5.3 -6.7,5.3 ; -5.9,-6.4 -5.1,-6.4 -5.1,-4.4 -5.9,-4.4 -5.9,-6.4 ; -4.4,-6.4 -4.4,-4.4 -3.6,-4.4 -3.6,-6.4 -4.4,-6.4 ; 0.5,-8.3 2.5,-8.3 2.5,-7.5 0.5,-7.5 0.5,-8.3 ; 2.628,7.2 2.628,8 4.628,8 4.628,7.2 2.628,7.2 ; 3.497,-6.8 7.797,-6.8 7.797,-3.2 3.497,-3.2 3.497,-6.8 ; 4.6,0.4 7.9,0.4 7.9,5.1 4.6,5.1 4.6,0.4 ; 5.174,5.5 5.174,6.3 7.174,6.3 7.174,5.5 5.174,5.5 ; 5.174,7.2 7.174,7.2 7.174,8 5.174,8 5.174,7.2 ; 7.1,-1.442 9.1,-1.442 9.1,-0.642 7.1,-0.642 7.1,-1.442 ; 7.6,-10.7 7.6,-7.4 11.5,-7.4 11.5,-10.7 7.6,-10.7 ; 8.7,7.4 8.7,10.7 12.6,10.7 12.6,7.4 8.7,7.4 ; 9.747,-6.9 9.747,-4.2 11.147,-4.2 11.147,-6.9 9.747,-6.9 ; 10.064,-1.442 12.064,-1.442 12.064,-0.642 10.064,-0.642 10.064,-1.442 ; 12.6,-5.2 16.4,-5.2 16.4,1.5 12.6,1.5 12.6,-5.2 ; 13.09,-8.8 13.89,-8.8 13.89,-6.8 13.09,-6.8 13.09,-8.8 ; 14.346,8.424 15.146,8.424 15.146,10.424 14.346,10.424 14.346,8.424 ; 15.4,-8.8 15.4,-6.8 16.2,-6.8 16.2,-8.8 15.4,-8.8 ; 15.7,8.424 16.5,8.424 16.5,10.424 15.7,10.424 15.7,8.424
  text "XP3" at 6.2,9.4 h2
  text "1n" at 16.5,8.9 h1.5 r90
  text "100" at 15.146,8.725 h1.5 r90
  text "XP4" at -6.2,8.7 h2
  text "XS1" at -14.3,8.5 h2
  text "C11" at 2.853,8 h2
  text "C12" at 5.554,8 h2
  text "36p" at 2.887,7.207 h1.5
  text "36p" at 5.412,7.207 h1.5
  text "R13" at 13,7 h2
  text "C8" at 15.446,7 h2
  text "L1" at -8.9,6.3 h2
  text "C1" at -6.3,6.3 h2
  text "0.1u" at 5.367,5.5 h1.5
  text "C9" at 3.68,5.35 h2
  text "0.1u" at -4.4,5.3 h1.5
  text "C7" at -11.2,4.3 h2
  text "C5" at -9.9,3.7 h2
  text "C6" at -8.5,3.7 h2
  text "BQ1" at -5,3.7 h2
  text "R2" at -13.1,2.3 h2
  text "DD5" at 5.156,2.196 h2
  text "4.7u" at -11.2,0.8 h1.5
  text "R1" at -16.4,0.7 h2
  text "0.1u" at -8.7,0.6 h1.5
  text "1k" at -12.9,0.5 h1.5
  text "DD1" at -5.9,0 h2
  text "4.7u" at -9.9,-0.1 h1.5
  text "10k" at -16.4,-0.4 h1.5
  text "100" at -11.8,-1.4 h1.5
  text "R4" at -9.8,-1.4 h2
  text "1n" at 7.7,-1.4 h1.5
  text "100" at 10.4,-1.45 h1.5
  text "FU1" at 13.6,-2.2 h2
  text "C10" at 7.2,-2.65 h2
  text "R14" at 10.1,-2.65 h2
  text "100" at -11.8,-2.7 h1.5
  text "R5" at -9.8,-2.7 h2
  text "R3" at -15,-2.9 h2
  text "10k" at -8.1,-3.3 h1.5
  text "1k" at -14.7,-3.9 h1.5
  text "VD1" at 9.4,-4 h2
  text "R6" at -8,-4.5 h2
  text "U1" at 4.997,-5.6 h2
  text "C2" at 0.924,-7.35 h2
  text "R7" at -6.2,-7.8 h2
  text "R9" at -4.5,-7.8 h2
  text "0.1u" at 0.7,-8.3 h1.5
  text "240" at -6.5,-8.9 h1.5
  text "240" at -4.5,-8.9 h1.5
  text "XP2" at -15.3,-9.3 h2
  text "XP1" at 5.2,-9.5 h2
  text "R12" at 12.645,-10 h2
  text "R11" at 14.9,-10 h2
  text "91" at 13.09,-10.9 h1.5
  text "91" at 15.3,-10.9 h1.5
BT:
  circle w0.3: c8.2,6.8 r0.1
  circle w0.3: c5.9,2.2 r0.1
  circle w0.3: c5.8,-2.3 r0.1
  circle w0.5: c13.9,-4.3 r0.224
  lines w0.15: 5.2,-9.8 5.2,-8.7 ; 5.3,-9.8 5.3,-8.7 ; 3.7,-9.8 6,-9.8 6,-8.7 3.7,-8.7 3.7,-9.8 ; 5.4,-2.7 8.5,-2.7 8.5,-0.7 5.4,-0.7 5.4,-2.7 ; 5.5,1.8 5.5,3.8 8.6,3.8 8.6,1.8 5.5,1.8 ; 5.5,5.2 5.5,7.2 8.6,7.2 8.6,5.2 5.5,5.2 ; 10.1,-3.5 10.9,-3.5 10.9,-1.5 10.1,-1.5 10.1,-3.5 ; 11.8,-4.9 14.5,-4.9 14.5,-1.1 11.8,-1.1 11.8,-4.9 ; 12.2,-6.8 14.2,-6.8 14.2,-6 12.2,-6 12.2,-6.8
  text "DD2" at 5.3,4.8 h2
  text "DD3" at 5.3,1.2 h2
  text "DA1" at 14.3,-0.8 h2
  text "C4" at 11.2,-1.3 h2
  text "DD4" at 5.2,-3.2 h2
  text "1u" at 10.9,-4.5 h1.5
  text "C3" at 13.8,-8 h2
  text "1u" at 13.5,-9 h1.5
  text "VD5" at 6,-11 h2
Mechanical 4:
  lines w0.1: -17,-11 -11,-11 11,-11 17,-11 17,-9 17,9 17,11 11,11 -11,11 -17,11 -17,9 -17,-9 -17,-11
Top Assm:
  rectangle: 2.75,4.182 4.25,5.25
  rectangle: -7.06,3.451 -6.5,4
  rectangle: -7.394,1.75 -6.25,3
  lines w0.2: 5.077,-9.695 5.077,-8.804